# EAGLE board BinyClock (EAGLE 5.06)
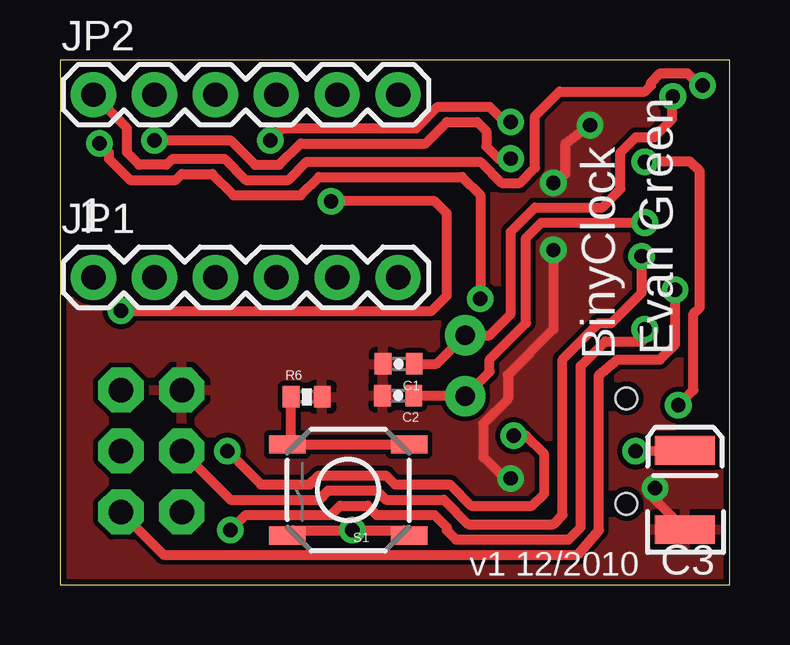
[diagram p0: board, top side]
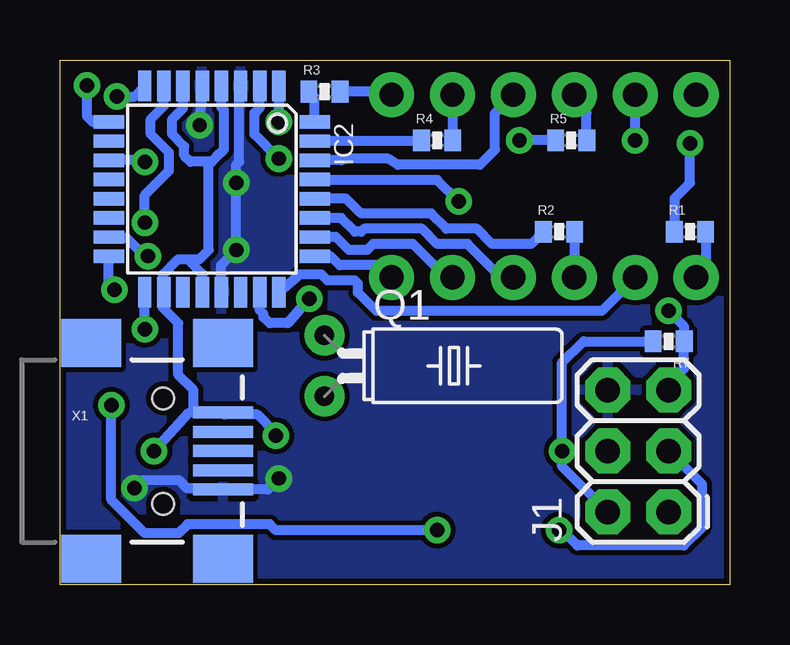
[diagram p1: board, bottom side, seen from below]

Size 27.92 x 21.89 mm. Coordinates in mm from the lower left corner, seen from the top.
Outline: 0,0 27.92,0 27.92,21.89 0,21.89 0,0
Copper layers (1*16): Top 0.035mm / dielectric 1.5mm / Bottom 0.035mm
Design rules "SparkFun": minimum track width 8mil, minimum drill 20mil, track to track 8mil, track to pad 8mil, pad to pad 8mil, via to via 8mil, smd to smd 8mil, copper to edge 10mil, drill to drill 8mil, minimum pad ring 12mil, minimum via ring 10mil, stop-mask expansion 4mil, vias tented up to drill 25mil, thermal gap 10mil

## Footprints (pad centres in the part's own frame; a part is rotated, then mirrored left to right if it is on the bottom)
0402-CAP = smd 0.7 x 0.9: 1 -0.65,0; 2 0.65,0
EIA3528 = smd 1.2 x 2.5: A 1.65,0; C -1.65,0
TQFP32-08 = smd 1.27 x 0.559: 1 -4.293,2.8; 2 -4.293,2; 3 -4.293,1.2; 4 -4.293,0.4; 5 -4.293,-0.4; 6 -4.293,-1.2; 7 -4.293,-2; 8 -4.293,-2.8; 17 4.293,-2.8; 18 4.293,-2; 19 4.293,-1.2; 20 4.293,-0.4; 21 4.293,0.4; 22 4.293,1.2; 23 4.293,2; 24 4.293,2.8 | smd 0.559 x 1.27: 9 -2.8,-4.293; 10 -2,-4.293; 11 -1.2,-4.293; 12 -0.4,-4.293; 13 0.4,-4.293; 14 1.2,-4.293; 15 2,-4.293; 16 2.8,-4.293; 25 2.8,4.293; 26 2,4.293; 27 1.2,4.293; 28 0.4,4.293; 29 -0.4,4.293; 30 -1.2,4.293; 31 -2,4.293; 32 -2.8,4.293
2X3 = drill 1.016 pad 1.88 octagon: 1 0,0; 2 0,2.54; 3 2.54,0; 4 2.54,2.54; 5 5.08,0; 6 5.08,2.54
1X06 = drill 1.016 pad 1.88 round: 1 0,0; 2 2.54,0; 3 5.08,0; 4 7.62,0; 5 10.16,0; 6 12.7,0
TC38H = drill 0.813 pad 1.676 round: 1 -1.27,0; 2 1.27,0
0402-RES = smd 0.7 x 0.9: 1 -0.65,0; 2 0.65,0
TACTILE_SWITCH_SMD = smd 1.524 x 0.762: 1 -2.54,1.905; 2 2.54,1.905; 3 -2.54,-1.905; 4 2.54,-1.905
USB-MINIB = smd 2.5 x 0.5: D+ 2.5,0; D- 2.5,0.8; GND 2.5,-1.6; ID 2.5,-0.8; VBUS 2.5,1.6 | smd 2.5 x 2: GND@1 -3,-4.5; GND@2 -3,4.5; GND@3 2.5,4.5; GND@4 2.5,-4.5 | hole 0.9: 0,2.2; 0,-2.2

## Placement (x,y rotation side)
C1  22pF  [0402-CAP]  14.12,9.22 180 top
C2  22pF  [0402-CAP]  14.1,7.9 180 top
C3  10uF  [EIA3528]  26.06,3.96 90 top
IC2  MEGA8-AI  [TQFP32-08]  21.59,16.51 270 bottom
J1  AVR_SPI_PRG_6PTH  [2X3]  2.54,3.05 90 bottom
JP1  [1X06]  1.4,12.83 0 top
JP2  [1X06]  1.4,20.45 0 top
Q1  20MHz  [TC38H]  16.89,9.14 270 bottom
R1  100  [0402-RES]  1.65,14.73 0 bottom
R2  100  [0402-RES]  7.11,14.73 0 bottom
R3  100  [0402-RES]  16.89,20.57 0 bottom
R4  100  [0402-RES]  12.19,18.54 0 bottom
R5  100  [0402-RES]  6.6,18.54 0 bottom
R6  10K  [0402-RES]  10.29,7.85 0 top
R7  10k  [0402-RES]  2.54,10.16 180 bottom
S1  [TACTILE_SWITCH_SMD]  12.01,3.96 180 top
X1  USBSMD  [USB-MINIB]  23.62,5.59 0 bottom

## Library data of the parts
C1-C3 J1 JP1 JP2 Q1 R1-R7 S1 X1 = SparkFun
IC2 = atmel

## Nets
COL1: IC2.23 R1.1
COL2: IC2.28 R2.1
COL3: IC2.1 R5.1
COL4: IC2.32 R3.1
COL5: IC2.31 R4.1
GND: C1.2 C2.2 C3.C IC2.3 IC2.5 IC2.21 J1.6 R6.2 X1.GND
INPUT: IC2.11 S1.1 S1.2
MISO: IC2.16 J1.1
MOSI: IC2.15 J1.4
N$2: JP1.1 R1.2
N$3: C2.1 IC2.7 Q1.2
N$4: R6.1 S1.3 S1.4
N$5: C1.1 IC2.8 Q1.1
N$8: JP1.3 R2.2
N$15: JP2.3 R5.2
N$18: JP2.5 R4.2
N$20: JP2.6 R3.2
RESET: IC2.29 J1.5 R7.1
ROW1: IC2.9 JP2.1
ROW2: IC2.2 JP2.2
ROW3: IC2.24 JP1.2
ROW4: IC2.30 JP2.4
ROW5: IC2.27 JP1.4
ROW6: IC2.26 JP1.5
ROW7: IC2.25 JP1.6
SCK: IC2.17 J1.3
VCC: C3.A IC2.4 IC2.6 IC2.18 IC2.20 J1.2 R7.2 X1.VBUS

## Tracks (layer width: path | path; a pad name or v marks a point on that pad's centre or on a via)
COL1  (via drill 0.6)
  Top 0.406: v1.65,18.41 2.03,18.03 2.03,17.78 2.92,16.89 4.83,16.89 5.08,17.14 6.35,17.14 7.24,16.26 10.03,16.26 10.79,17.02 16.76,17.02 17.53,16.26 v17.53,11.94
  Bottom 0.406: 2.43,14.61 R1.1 2.29,14.75 2.29,16.13 1.65,16.76 v1.65,18.41 | v17.53,11.94 18.41,10.92 19.18,10.92 19.43,11.18 19.43,11.3 19.59,11.46 IC2.23
COL2
  Bottom 0.406: R2.1 8.27,14.22 9.91,14.22 10.54,14.86 11.81,14.86 12.45,15.49 15.37,15.49 15.98,16.11 IC2.28
COL3  (via drill 0.6)
  Top 0.406: v8.76,18.54 9.27,19.05 14.86,19.05 15.75,19.94 17.91,19.94 18.54,19.3 v18.8,19.3
  Bottom 0.406: R5.1 v8.76,18.54 | v18.8,19.3 v18.79,19.31 IC2.1
COL4
  Bottom 0.406: R3.1 17.3,20.33 IC2.32
COL5
  Bottom 0.406: R4.1 12.87,18.51 IC2.31
GND  (via drill 0.6)
  Top 0.406: v22.1,19.18 21.08,18.41 21.08,17.14 20.7,16.76 v20.57,16.76 | C3.C 24.82,3.56 v24.82,4.04 | v20.57,13.97 20.57,10.67 18.67,8.76 18.67,7.75 17.65,6.73 17.65,5.33 18.54,4.45 v18.8,4.45
  Bottom 0.406: IC2.3 20.45,20.75 20.45,17.65 20.57,17.53 v20.57,16.76 v20.57,13.97 21.21,13.34 21.21,12.24 IC2.21 | IC2.5 21.97,20.78 v22.1,19.18 | v24.82,4.04 24.49,4.37 22.96,4.37 22.63,4.04 21.95,4.04 21.89,3.99 X1.GND 19.25,3.99 v18.8,4.45
  pour Bottom: 0,0 27.94,0 27.94,21.84 0,21.84 0,21.59
  pour Top: 0,0 27.94,0 27.94,21.84 0,21.84 0,21.59
INPUT  (via drill 0.6)
  Top 0.406: S1.1 14.33,2.29 v12.19,2.29 9.7,2.29 S1.2 | v25.78,7.49 26.42,8.13 26.42,11.3 26.67,11.56 26.67,17.27 26.29,17.65 v24.38,17.65
  Bottom 0.406: v12.19,2.29 18.92,2.29 19.18,2.54 22.61,2.54 22.99,2.16 24.38,2.16 25.78,3.56 v25.78,7.49 | v24.38,17.65 24.44,17.71 IC2.11
MISO  (via drill 0.6)
  Top 0.406: J1.1 4.32,1.27 21.59,1.27 22.48,2.29 22.48,8.76 23.24,9.4 25.02,9.4 25.65,10.03 v25.65,12.32
  Bottom 0.406: v25.65,12.32 25.88,12.55 IC2.16
MOSI  (via drill 0.6)
  Top 0.406: J1.4 7.11,3.56 10.79,3.56 11.18,3.94 13.21,3.94 13.59,3.56 16,3.56 17.02,2.54 20.57,2.54 20.95,2.92 20.95,9.4 22.48,10.92 22.99,10.92 24.26,12.19 v24.26,13.72
  Bottom 0.406: IC2.15 25.85,14.48 25.15,14.48 24.38,13.72 v24.26,13.72
N$2
  Bottom 0.406: JP1.1 1,13.22 R1.2
N$3  (via drill 0.6)
  Top 0.406: C2.1 16.87,7.9 Q1.2 17.91,8.89 17.91,9.4 19.43,10.92 19.43,14.48 20.07,15.11 v24.38,15.11
  Bottom 0.406: v24.38,15.11 24.38,16.26 23.37,17.27 23.37,18.03 24.13,18.8 24.13,19.43 23.59,19.97 IC2.7
N$4
  Top 0.406: S1.3 S1.4 9.64,6.03 R6.1
N$5  (via drill 0.6)
  Top 0.406: C1.1 15.7,9.22 Q1.1 17.91,10.41 18.8,11.3 18.8,14.73 19.81,15.75 22.61,15.75 23.37,16.51 23.37,18.03 24,18.67 24.77,18.67 25.53,19.43 v25.55,20.37
  Bottom 0.406: IC2.8 24.81,20.37 v25.55,20.37
N$8
  Bottom 0.406: JP1.3 6.46,12.84 R2.2
N$15
  Bottom 0.406: R5.2 5.97,18.56 5.97,19.68 6.48,20.19 JP2.3
N$18
  Bottom 0.406: JP2.5 11.54,20.43 R4.2
N$20
  Bottom 0.406: JP2.6 14.22,20.57 R3.2
RESET  (via drill 0.6)
  Top 0.406: v11.3,16 15.62,16 16.13,15.49 16.13,12.06 15.49,11.43 v2.54,11.43
  Bottom 0.406: J1.5 2.54,8.38 1.91,9.02 1.91,10.14 R7.1 1.89,10.78 v2.54,11.43 | IC2.29 17.28,16.89 12.19,16.89 v11.3,16
ROW1  (via drill 0.6)
  Top 0.406: JP2.1 2.79,19.05 2.79,18.03 3.3,17.53 4.45,17.53 4.7,17.78 6.86,17.78 7.75,16.89 9.53,16.89 10.29,17.65 17.53,17.65 18.41,16.76 19.18,16.76 19.81,17.4 19.81,19.56 20.83,20.57 24.38,20.57 24.64,20.83 24.64,20.95 25.02,21.34 26.16,21.34 26.67,20.83 v26.8,20.83
  Bottom 0.406: IC2.9 26.55,19.31 26.8,19.56 v26.8,20.83
ROW2  (via drill 0.6)
  Top 0.406: v3.94,18.54 7.11,18.54 8.13,17.53 9.14,17.53 10.03,18.41 15.24,18.41 16.13,19.3 17.4,19.3 17.78,18.92 17.78,18.29 18.29,17.78 v18.8,17.78
  Bottom 0.406: v3.94,18.54 JP2.2 | v18.8,17.78 19.81,18.8 19.81,19.68 19.59,19.91 IC2.2
ROW3
  Bottom 0.406: IC2.24 18.77,12.22 17.91,12.95 17.02,12.95 16.76,12.7 15.62,12.7 15.49,12.57 15.49,12.19 14.73,11.43 5.33,11.43 JP1.2
ROW4
  Bottom 0.406: JP2.4 9.78,19.68 9.78,18.16 10.41,17.53 13.84,17.53 14.22,17.78 16,17.78 16.2,17.71 IC2.30
ROW5
  Bottom 0.406: JP1.4 9.53,12.83 10.92,14.22 12.19,14.22 12.83,14.86 15.24,14.86 15.37,14.73 15.62,14.73 16.2,15.31 IC2.27
ROW6
  Bottom 0.406: JP1.5 11.81,12.83 13.21,14.22 14.86,14.22 15.11,13.97 15.88,13.97 16.41,14.51 IC2.26
ROW7
  Bottom 0.406: JP1.6 14.61,13.34 16.26,13.34 16.63,13.71 IC2.25
SCK  (via drill 0.6)
  Top 0.406: v24.38,10.67 24.38,10.29 24.26,10.16 22.73,10.16 21.72,9.14 21.72,2.41 21.21,1.91 16.51,1.91 16.13,2.29 16.13,2.41 15.62,2.92 13.21,2.92 12.83,3.3 11.68,3.3 11.3,2.92 7.75,2.92 v7.11,2.29
  Bottom 0.406: J1.3 1.14,4.19 1.14,2.41 1.91,1.65 6.35,1.65 6.99,2.29 v7.11,2.29 | v24.38,10.67 v24.39,10.67 IC2.17
VCC  (via drill 0.6)
  Top 0.406: C3.A 24.26,5.59 v24,5.59 | v18.92,6.22 19.43,6.22 20.19,5.46 20.19,3.81 19.68,3.3 17.14,3.3 16.26,4.19 13.97,4.19 13.59,4.57 10.79,4.57 10.41,4.19 8.38,4.19 v6.99,5.59
  Bottom 0.406: J1.2 6.99,4.95 v6.99,5.59 6.99,9.27 6.1,10.16 R7.2 | v24,5.59 22.53,7.19 22.35,7.19 | 22.35,7.19 X1.VBUS 21.05,7.11 19.68,7.11 18.92,6.35 v18.92,6.22 | 22.61,13.59 22.99,13.59 23.62,12.95 23.62,12.25 IC2.18 23.62,12.19 23.62,11.56 22.99,10.92 22.99,8.76 22.35,8.13 22.35,7.19 | 22.61,13.59 21.99,12.97 IC2.20 | 21.21,20.78 IC2.4 21.19,19.92 21.08,19.81 21.08,18.16 21.4,17.84 | 21.4,17.84 21.72,17.53 21.72,13.97 22.1,13.59 22.61,13.59 | 22.86,20.73 IC2.6 22.79,19.88 23.24,19.43 23.24,18.8 22.73,18.29 22.73,17.91 22.48,17.65 21.59,17.65 21.4,17.84

## Text on the board
tPlace: Evan Green | BinyClock | 1 | v1 12/2010